# Altium PCB H743ZI_SD_LCD_DRAM_Dev.PcbDoc (part 1 of 2)
Units mm, origin at the board's own origin, x right, y up, seen from the top; angles counter-clockwise.
Board outline 91.52 x 133.34 mm, 2 copper layers (Top Layer, Bottom Layer); 88 components, 125 nets, 598 pads, 322 vias.
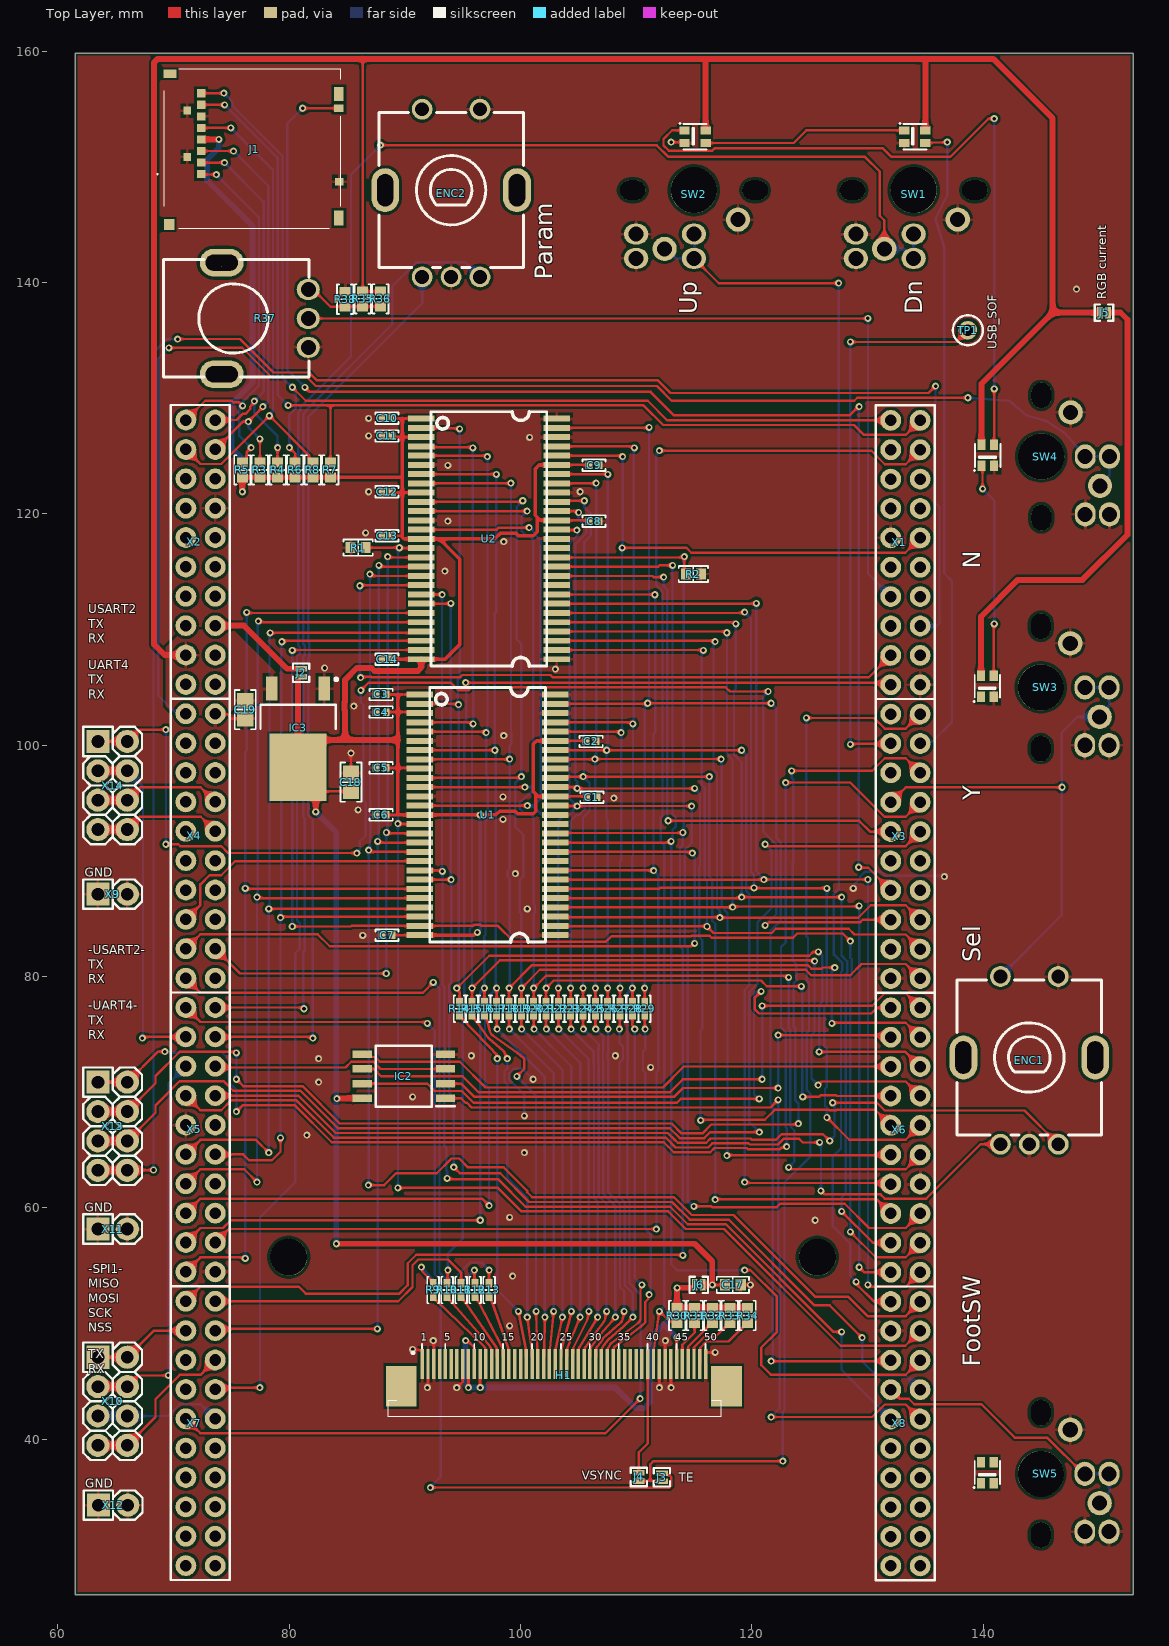
[diagram p0: Top Layer view]
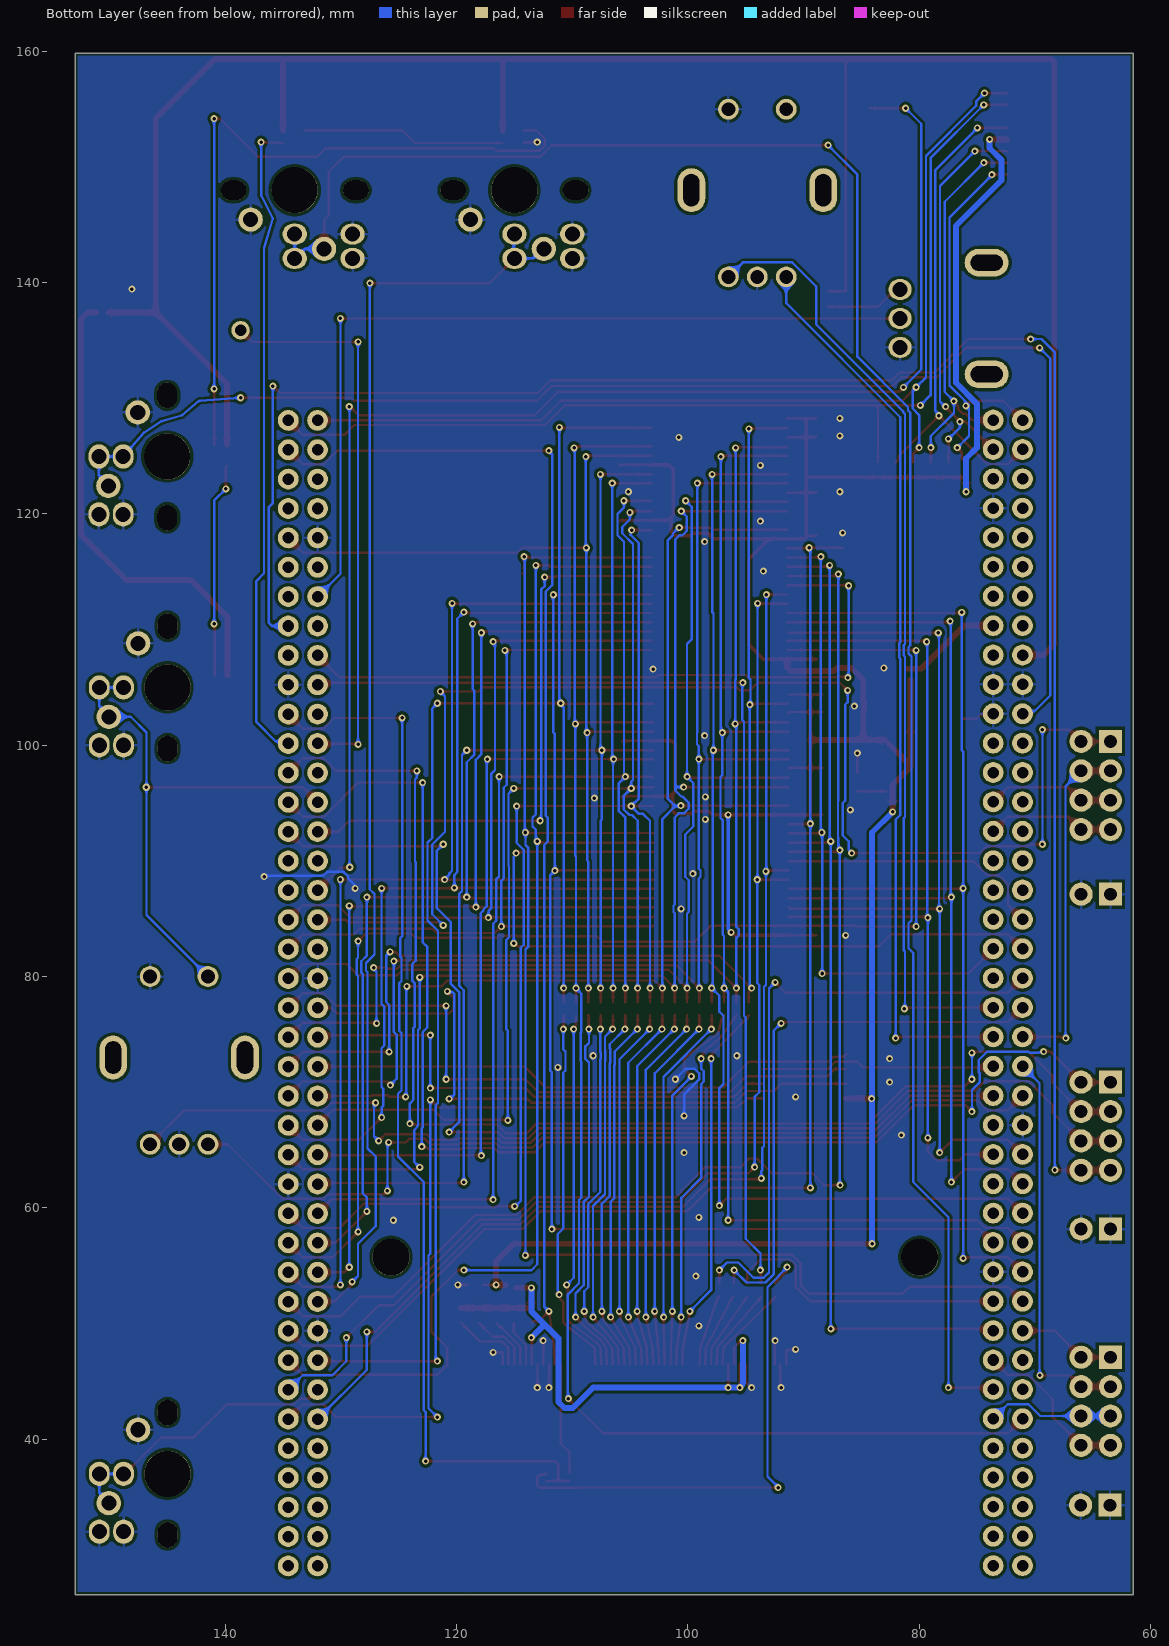
[diagram p1: Bottom Layer view, seen from below]

## Layer stack, top to bottom
Top Solder: solder mask 0.0102, Solder Resist, Dk 3.5
Top Layer: signal copper 0.0356
Dielectric 1: dielectric 0.32, FR-4, Dk 4.8
Bottom Layer: signal copper 0.0356
Bottom Solder: solder mask 0.0102, Solder Resist, Dk 3.5

## Board outline
61.479,26.521 61.479,159.861 153,159.861 153,26.521 135.818,26.521 119.187,26.521 105.187,26.521

## Design rules (kind name [scope] priority, off if disabled: settings)
BoardOutlineClearance [All] p1: gap=0.254 ignorepadtopadclearanceinfootprint=FALSE except(0: Arc-SplitContinuation Track-SplitContinuation SMDPad-SplitContinuation THPad-SplitContinuation Via-SplitContinuation Fill-SplitContinuation Poly-SplitContinuation Region-SplitContinuation Text-SplitContinuation)
Clearance [All] p1: gap=0.254 ignorepadtopadclearanceinfootprint=FALSE except(0.203: Arc-Arc Arc-Track Arc-SMDPad Arc-Fill Arc-Poly Arc-Region Track-Track Track-SMDPad Track-Fill Track-Poly Track-Region SMDPad-SMDPad SMDPad-Fill SMDPad-Poly SMDPad-Region)
PolygonConnect [All] p1: thpad.connectstyle=Relief thpad.reliefconductorwidth=0.254 thpad.reliefentries=4 thpad.polygonreliefangle="90 Angle" thpad.airgapwidth=0.254 smdpad.connectstyle=Relief smdpad.reliefconductorwidth=0.254 smdpad.reliefentries=4 smdpad.polygonreliefangle="90 Angle" smdpad.airgapwidth=0.254 via.connectstyle=Direct via.reliefconductorwidth=0.254 via.reliefentries=4 via.polygonreliefangle="90 Angle" via.airgapwidth=0.254
RoutingVias [All] p1: holewidth=0.305 width=0.61 viastyle="Through Hole" minholewidth=0.305 minwidth=0.61 maxholewidth=0.305 maxwidth=0.61
SolderMaskExpansion [All] p1: expansion=0.102 istentingtop=FALSE
Width [All] p1: maxlimit=0.635 minlimit=0.203 preferedwidth=0.203
30 further rules are at their usual default settings.

## Classes and differential pairs
net class D[0..15]: D0 D1 D2 D3 D4 D5 D6 D7 D8 D9 D10 D11 D12 D13 D14 D15
net class A[0..11]: A0 A1 A2 A3 A4 A5 A6 A7 A8 A9 A10 A11

## Components (designator, comment, footprint, x,y, rotation, side; value= is the part's Value field where it differs from the comment)
C1 "0.1µF" "CAP 0402_1005" 106.172,95.504 r0 top
C2 "0.1µF" "CAP 0402_1005" 106.104,100.33 r0 top
C3 "0.1µF" "CAP 0402_1005" 87.952,104.394 r180 top
C4 "0.1µF" "CAP 0402_1005" 87.952,102.87 r180 top
C5 "0.1µF" "CAP 0402_1005" 87.952,98.044 r180 top
C6 "0.1µF" "CAP 0402_1005" 87.952,93.98 r180 top
C7 "0.1µF" "CAP 0402_1005" 88.46,83.566 r180 top
C8 "0.1µF" "CAP 0402_1005" 106.358,119.38 r0 top
C9 "0.1µF" "CAP 0402_1005" 106.358,124.206 r0 top
C10 "0.1µF" "CAP 0402_1005" 88.46,128.27 r180 top
C11 "0.1µF" "CAP 0402_1005" 88.46,126.746 r180 top
C12 "0.1µF" "CAP 0402_1005" 88.46,121.92 r180 top
C13 "0.1µF" "CAP 0402_1005" 88.46,118.11 r180 top
C14 "0.1µF" "CAP 0402_1005" 88.46,107.442 r180 top
C17 "0.1 µF" "CAP 0603_1608" 118.364,53.34 r180 top
C18 "10 µF" "CAP 0805_2012" 85.344,96.812 r270 top
C19 "1 µF" "CAP 0805_2012" 76.2,103.086 r90 top
ENC1 "Encoder_15mm" EC11_15mm 144,73 r0 top
ENC2 "Encoder_15mm" EC11_15mm 94,148 r0 top
H1 "FFC_50_DBG" FFC_50_DBG 100.004,44.232 r0 top
IC2 "N25Q128A13ESE40F" SOIC127P790X216-8N 89.916,71.374 r180 top
IC3 "LD1117DT33TR" TO228P972X240-3N 80.766,100.552 r270 top
J1 "SCHA4B0400" SCHA4B0400 71.19,151.609 r270 top
J2 "" "CON: JUMPER x1" 81.026,106.618 r270 top
J3 "" "CON: JUMPER x1" 112.237,37.053 r270 top
J4 "" "CON: JUMPER x1" 110.236,37.084 r270 top
J5 "" "CON: JUMPER x1" 150.114,137.414 r0 top
J6 "" "CON: JUMPER x1" 115.762,53.34 r180 top
R1 "10 kOhms" "RES 0603_1608" 85.964,117.094 r0 top
R2 "10 kOhms" "RES 0603_1608" 114.95,114.808 r180 top
R3 "10 kOhms" "RES 0603_1608" 77.47,123.81 r270 top
R4 "10 kOhms" "RES 0603_1608" 78.994,123.81 r270 top
R5 "10 kOhms" "RES 0603_1608" 75.946,123.81 r270 top
R6 "10 kOhms" "RES 0603_1608" 80.518,123.81 r270 top
R7 "10 kOhms" "RES 0603_1608" 83.566,123.81 r270 top
R8 "10 kOhms" "RES 0603_1608" 82.042,123.81 r270 top
R9 "22 Ohms" "RES 0402_1005" 92.456,52.899 r90 top
R10 "22 Ohms" "RES 0402_1005" 93.662,52.899 r90 top
R11 "22 Ohms" "RES 0402_1005" 94.869,52.899 r90 top
R12 "22 Ohms" "RES 0402_1005" 96.075,52.899 r90 top
R13 "22 Ohms" "RES 0402_1005" 97.282,52.899 r90 top
R14 "22 Ohms" "RES 0402_1005" 94.742,77.216 r90 top
R15 "22 Ohms" "RES 0402_1005" 95.809,77.216 r90 top
R16 "22 Ohms" "RES 0402_1005" 96.876,77.216 r90 top
R17 "22 Ohms" "RES 0402_1005" 97.942,77.216 r90 top
R18 "22 Ohms" "RES 0402_1005" 99.009,77.216 r90 top
R19 "22 Ohms" "RES 0402_1005" 100.076,77.216 r90 top
R20 "22 Ohms" "RES 0402_1005" 101.143,77.216 r90 top
R21 "22 Ohms" "RES 0402_1005" 102.21,77.216 r90 top
R22 "22 Ohms" "RES 0402_1005" 103.276,77.216 r90 top
R23 "22 Ohms" "RES 0402_1005" 104.343,77.216 r90 top
R24 "22 Ohms" "RES 0402_1005" 105.41,77.216 r90 top
R25 "22 Ohms" "RES 0402_1005" 106.477,77.216 r90 top
R26 "22 Ohms" "RES 0402_1005" 107.544,77.216 r90 top
R27 "22 Ohms" "RES 0402_1005" 108.61,77.216 r90 top
R28 "22 Ohms" "RES 0402_1005" 109.677,77.216 r90 top
R29 "22 Ohms" "RES 0402_1005" 110.744,77.216 r90 top
R30 "10 kOhms" "RES 0603_1608" 113.538,50.688 r90 top
R31 "10 Ohms" "RES 0603_1608" 115.062,50.688 r90 top
R32 "10 Ohms" "RES 0603_1608" 116.586,50.688 r90 top
R33 "10 Ohms" "RES 0603_1608" 118.11,50.688 r90 top
R34 "10 Ohms" "RES 0603_1608" 119.634,50.688 r90 top
R35 "10 kOhms" "RES 0603_1608" 86.36,138.602 r90 top
R36 "10 kOhms" "RES 0603_1608" 87.884,138.602 r90 top
R37 "100k" POT 75.946,136.906 r90 top
R38 "10 kOhms" "RES 0603_1608" 84.836,138.572 r270 top
SW1 "Kailh" KAILH_UNI_MX_WS2812 134,148 r180 top
SW2 "Kailh" KAILH_UNI_MX_WS2812 115,148 r180 top
SW3 "Kailh" KAILH_UNI_MX_WS2812 145,105 r270 top
SW4 "Kailh" KAILH_UNI_MX_WS2812 145.034,124.968 r270 top
SW5 "Kailh" KAILH_UNI_MX_WS2812 145,37 r270 top
TP1 "Test point, Keystone, 5001" "CON: 5116 (Keystone)" 138.684,135.89 r180 top
U1 "W9812G6KH-6" TSOP-54 97.155,93.98 r270 top
U2 "W9812G6KH-6" TSOP-54 97.274,117.842 r270 top
X1 "Connector, 20pin, 2.54mm, 500VAC, 3A" "CON: PBD-20" 132.024,128.095 r270 top
X2 "Connector, 20pin, 2.54mm, 500VAC, 3A" "CON: PBD-20" 71.064,128.12 r270 top
X3 "Connector, 20pin, 2.54mm, 500VAC, 3A" "CON: PBD-20" 132.024,102.695 r270 top
X4 "Connector, 20pin, 2.54mm, 500VAC, 3A" "CON: PBD-20" 71.064,102.72 r270 top
X5 "Connector, 20pin, 2.54mm, 500VAC, 3A" "CON: PBD-20" 71.064,77.32 r270 top
X6 "Connector, 20pin, 2.54mm, 500VAC, 3A" "CON: PBD-20" 132.024,77.295 r270 top
X7 "Connector, 20pin, 2.54mm, 500VAC, 3A" "CON: PBD-20" 71.064,51.92 r270 top
X8 "Connector, 20pin, 2.54mm, 500VAC, 3A" "CON: PBD-20" 132.024,51.895 r270 top
X9 "Connector, 2pin, 2.54mm, 500VAC, 3A" "CON: PLS-2" 64.73,87.122 r0 top
X10 "Connector, 8pin, 2.54mm, 500VAC, 3A" "CON: PLD-8" 64.73,43.27 r270 top
X11 "Connector, 2pin, 2.54mm, 500VAC, 3A" "CON: PLS-2" 64.73,58.166 r0 top
X12 "Connector, 2pin, 2.54mm, 500VAC, 3A" "CON: PLS-2" 64.77,34.29 r0 top
X13 "Connector, 8pin, 2.54mm, 500VAC, 3A" "CON: PLD-8" 64.73,67.056 r270 top
X14 "Connector, 8pin, 2.54mm, 500VAC, 3A" "CON: PLD-8" 64.73,96.52 r270 top

## Footprints (in the part's own frame and the unit in brackets; to place one, negate y for a bottom-side part, rotate by r counter-clockwise, add the part's x,y. Pads: shape width x height; smd on the part's side, far side on the other; paste and mask are expansions set on the pad)
"CAP 0402_1005" [mm] "Chip Capacitor, 2-Leads, Body 1.02x0.51mm, IPC Medium Density"
  rect 0.6x0.64 smd: 1(-0.44,0) 2(0.44,0)
  silkscreen extent -1,-0.5 1,0.5, body extent -0.5,-0.26 0.5,0.26, height 0.52
"CAP 0603_1608" [mm] "Chip Capacitor, 2-Leads, Body 1.60x0.80mm, IPC Medium Density"
  rect 0.9x1 smd: 1(-0.675,0) 2(0.675,0)
  silkscreen extent -1.4,-0.7 1.4,0.7, body extent -0.8,-0.41 0.8,0.41, height 0.82
"CAP 0805_2012" [mm] "Chip Capacitor, 2-Leads, Body 2.00x1.20mm, IPC Medium Density"
  rect 1.3x1.4 smd: 1(-0.8,0) 2(0.8,0)
  silkscreen extent -1.7,-0.9 1.7,0.9, body extent -1,-0.64 1,0.64, height 1.26
"CON: 5116 (Keystone)" [mm]
  round 1.6 hole 1: 1(0,0)
  silkscreen extent -1.3,-1.3 1.3,1.3, body extent -1.27,-1.27 1.27,1.27, height 4.94
"CON: JUMPER x1" [mm]
  rect 0.5x1 smd: 1(0,0) 2(0.7,0)
  silkscreen extent -0.45,-0.7 1.15,0.7
"CON: PBD-20" [mm]
  round 1.8 hole 1: 1(0,0) 2(0,2.54) 3(2.54,0) 4(2.54,2.54) 5(5.08,0) 6(5.08,2.54) 7(7.62,0) 8(7.62,2.54) 9(10.16,0) 10(10.16,2.54) 11(12.7,0) 12(12.7,2.54) 13(15.24,0) 14(15.24,2.54) 15(17.78,0) 16(17.78,2.54) 17(20.32,0) 18(20.32,2.54) 19(22.86,0) 20(22.86,2.54)
  round 0.5 on Top Overlay: ""(-1.775,-1.05)
  round 0.5 on Mech1: ""(-0.6,-0.7)
  silkscreen extent -1.3,-1.3 24.1,3.8, body extent -1.3,-1.3 24.1,3.78, height 8.4
"CON: PLD-8" [mm] "PLD-40 8 pin header"
  rect 2x2 hole 1.1: 1(-3.81,-1.27)
  round 2 hole 1.1: 2(-3.81,1.27) 3(-1.27,-1.27) 4(-1.27,1.27) 5(1.27,-1.27) 6(1.27,1.27) 7(3.81,-1.27) 8(3.81,1.27)
  silkscreen extent -5.08,-2.54 5.08,2.54, body extent -5.13,-2.55 5.03,2.53, height 8.54
"CON: PLS-2" [mm]
  rect 2x2 hole 1.1: 1(-1.27,0)
  round 2 hole 1.1: 2(1.27,0)
  silkscreen extent -2.54,-1.27 2.54,1.27, body extent -2.57,-1.28 2.51,1.26, height 8.54
EC11_15mm [mm]
  round 1.8 hole 1.2: 1(-2.5,7) 2(2.5,7) A(-2.5,-7.5) B(2.5,-7.5) C(0,-7.5)
  oval 2.4x3.8 hole 1.4 slot 2.8 at 90 deg: MT1(-5.7,0) MT2(5.7,0)
  silkscreen extent -6.25,-6.7 6.25,6.7, body extent -6,-7.67 6,7.25, height 21.9
FFC_50_DBG [mm]
  rect 0.3x2.6 smd: 1(-8.5,2.25) 2(-8,2.25) 3(-7.5,2.25) 4(-7,2.25) 5(-6.5,2.25) 6(-6,2.25) 7(-5.5,2.25) 8(-5,2.25) 9(-4.5,2.25) 10(-4,2.25) 11(-3.5,2.25) 12(-3,2.25) 13(-2.5,2.25) 14(-2,2.25) 15(-1.5,2.25) 16(-1,2.25) 17(-0.5,2.25) 18(0,2.25) 19(0.5,2.25) 20(1,2.25) 21(1.5,2.25) 22(2,2.25) 23(2.5,2.25) 24(3,2.25) 25(3.5,2.25) 26(4,2.25) 27(4.5,2.25) 28(5,2.25) 29(5.5,2.25) 30(6,2.25) 31(6.5,2.25) 32(7,2.25) 33(7.5,2.25) 34(8,2.25) 35(8.5,2.25) 36(9,2.25) 37(9.5,2.25) 38(10,2.25) 39(10.5,2.25) 40(11,2.25) 41(11.5,2.25) 42(12,2.25) 43(12.5,2.25) 44(13,2.25) 45(13.5,2.25) 46(14,2.25) 47(14.5,2.25) 48(15,2.25) 49(15.5,2.25) 50(16,2.25)
  rect 2.65x3.5 smd: MP1(-10.312,0.356) MP1(17.812,0.356)
  silkscreen extent -11.5,-2.29 17.35,4.01, body extent -11.49,-2.32 19.01,3.32, height 2.06
KAILH_UNI_MX_WS2812 [mm] "Universal footprint for low-profile and regular switches, direct solder. Kailh RGB Black also supported without led, LED is ws2812 in 2020 package"
  rect 0.9x0.7 smd: 1(0.815,-5.174) 2(0.815,-4.074) 3(-1.015,-4.074) 4(-1.015,-5.174)
  round 2.1 hole 1.3: S1(-3.81,2.54) S2(2.54,5.08)
  oval 2.1x1.8 hole 1.3: S1(5,3.8) S1(5,5.9) S2(0,5.9) S2(0,3.8)
  oval 2.2x1.7 hole 1.7 slot 2.2 at 0 deg unplated paste-2539.97: ""(-5.29,0) ""(5.29,0)
  round 3.98 hole 3.98 unplated paste-2539.97: ""(0,0)
  silkscreen extent -1.1,-5.77 1.2,-3.52, body extent -7.5,-7.5 7.5,7.5, height 8.2
POT [mm]
  oval 1.8x2 hole 1.3: 1(-2.5,-5.704) 2(0,-5.704) 3(2.5,-5.704)
  oval 2.4x3.8 hole 1.4 slot 2.8 at 90 deg: MT1(-4.826,1.778) MT1(4.826,1.778)
  silkscreen extent -5.08,-5.76 5.08,6.81, body extent -5.64,-5.73 5.64,6.92, height 21.1
"RES 0402_1005" [mm] "Chip Resistor, 2-Leads, Body 1.0x0.5mm, IPC Medium Density"
  rect 0.75x0.6 smd: 1(-0.575,0) 2(0.575,0)
  silkscreen extent -1.14,-0.51 1.14,0.51, body extent -0.5,-0.25 0.5,0.25, height 0.35
"RES 0603_1608" [mm] "Chip Resistor, 2-Leads, Body 1.60x0.80mm, IPC Medium Density"
  rect 0.85x0.95 smd: 1(-0.65,0) 2(0.65,0)
  silkscreen extent -1.27,-0.7 1.27,0.7, body extent -0.8,-0.4 0.8,0.4, height 0.45
SCHA4B0400 [mm]
  rect 0.7x0.75 smd: 1(2.225,1.2) 2(1.225,1.2) 3(0.225,1.2) 4(-0.775,1.2) 5(-1.775,1.2) 6(-2.775,1.2) 7(-3.775,1.2) 8(-4.775,1.2)
  rect 0.7x0.65 smd: 9(-3.275,0) 10(0.725,0)
  rect 0.65x0.85 smd: 11(-3.475,13.1)
  rect 0.65x0.75 smd: 12(2.875,13.15)
  rect 1.3x0.85 smd: MP1(6.013,13.1)
  rect 0.95x0.9 smd: MP2(6.575,-1.575)
  rect 0.745x1.15 smd: MP3(-6.46,-1.5)
  rect 1.2x0.85 smd: MP4(-4.713,13.1)
  silkscreen extent -6.91,-2.62 6.91,13.28, body extent -6.91,-2 6.96,13.46, height 1.39
SOIC127P790X216-8N [mm]
  rect 1.65x0.65 smd: 1(-3.6,1.905) 2(-3.6,0.635) 3(-3.6,-0.635) 4(-3.6,-1.905) 5(3.6,-1.905) 6(3.6,-0.635) 7(3.6,0.635) 8(3.6,1.905)
  silkscreen extent -4.43,-2.64 2.42,2.64, body extent -3.95,-2.64 3.95,2.64, height 2.16
TO228P972X240-3N [mm]
  rect 2.1x1 smd: 1(-4.35,2.28) 3(-4.35,-2.28)
  rect 5.85x4.9 smd: 4(2.45,0)
  silkscreen extent -5.27,-3.25 -0.85,3.43, body extent -4.97,-3.3 4.56,3.3, height 2.3
TSOP-54 [mil]
  rect 20x90 smd: 1(-409.45,-230.31) 2(-377.95,-230.31) 3(-346.46,-230.31) 4(-314.96,-230.31) 5(-283.46,-230.31) 6(-251.97,-230.31) 7(-220.47,-230.31) 8(-188.98,-230.31) 9(-157.48,-230.31) 10(-125.98,-230.31) 11(-94.49,-230.31) 12(-62.99,-230.31) 13(-31.5,-230.31) 14(0,-230.31) 15(31.5,-230.31) 16(62.99,-230.31) 17(94.49,-230.31) 18(125.98,-230.31) 19(157.48,-230.31) 20(188.98,-230.31) 21(220.47,-230.31) 22(251.97,-230.31) 23(283.46,-230.31) 24(314.96,-230.31) 25(346.46,-230.31) 26(377.95,-230.31) 27(409.45,-230.31) 28(409.45,230.32) 29(377.95,230.32) 30(346.46,230.32) 31(314.96,230.32) 32(283.46,230.32) 33(251.97,230.32) 34(220.47,230.32) 35(188.98,230.32) 36(157.48,230.32) 37(125.98,230.32) 38(94.49,230.32) 39(62.99,230.32) 40(31.5,230.32) 41(0,230.32) 42(-31.5,230.32) 43(-62.99,230.32) 44(-94.49,230.32) 45(-125.98,230.32) 46(-157.48,230.32) 47(-188.98,230.32) 48(-220.47,230.32) 49(-251.97,230.32) 50(-283.46,230.32) 51(-314.96,230.32) 52(-346.46,230.32) 53(-377.95,230.32) 54(-409.45,230.32)
  silkscreen extent -433,-197 433,197, body extent -443,-230 443,226, height 55

## Part data
C1 C2 C3 C4 C5 C6 C7 C8 C9 C10 C11 C12 C13 C14: library part C0402C104K4RACAUTO, "CAP CER 0.1UF 16V X7R 0402", Device Package="0402 (1005 Metric)", Manufacturer=KEMET, Operating Temperature="-55°C ~ 125°C", Ratings=AEC-Q200, Supplier Part Number 1=399-6828-1-ND, Temperature Coefficient=X7R, Tolerance=±10%, Voltage - Rated=16V, Applications="Automotive, Bypass, Decoupling", Capacitance=0.1µF, ComponentLink1Description=Datasheet, ComponentLink1URL=https://api.kemet.com/component-edge/download/specsheet/C0402C104K4RACAUTO.pdf, ComponentLink2Description="DigiKey Link", ComponentLink2URL=http://digikey.com/product-detail/en/kemet/C0402C104K4RACAUTO/399-6828-1-ND/3314343, LastUpdated="9/2/2020 1:02:21 AM", Lifecycle Status=Active, Minimum Order=1, Mounting Type="Surface Mount, MLCC", Package / Case="0402 (1005 Metric)", Packaging=TapeAndReel, Part Number=C0402C104K4RACAUTO, Part Status=Active, PartId=3024, Price=0.01, Series="SMD Auto X7R", Size / Dimension="0.039\" L x 0.020\" W (1.00mm x 0.50mm)", Supplier 1=DigiKey, Thickness (Max)="0.022\" (0.55mm)"
C17: library part C0603C104K5RAC7411, "CAP CER 0.1UF 50V X7R 0603", Device Package="0603 (1608 Metric)", Manufacturer=KEMET, Operating Temperature="-55°C ~ 125°C", Supplier Part Number 1=399-C0603C104K5RAC7411CT-ND, Temperature Coefficient=X7R, Tolerance=±10%, Voltage - Rated=50V, Applications="Bypass, Decoupling", Capacitance="0.1 µF", ComponentLink1Description=Datasheet, ComponentLink1URL=https://api.kemet.com/component-edge/download/datasheet/C0603C104K5RAC7411.pdf, ComponentLink2Description="DigiKey Link", ComponentLink2URL=https://www.digikey.com/en/products/detail/kemet/C0603C104K5RAC7411/3317013, LastUpdated="2/9/2024 8:10:30 PM", Lifecycle Status=Active, Minimum Order=1, Mounting Type="Surface Mount, MLCC", Package / Case="0603 (1608 Metric)", Packaging=TapeAndReel, Part Number=C0603C104K5RAC7411, Part Status=Active, PartId=2233, Price=0.01, Series="SMD Comm X7R", Size / Dimension="0.063\" L x 0.031\" W (1.60mm x 0.80mm)", Supplier 1=DigiKey, Thickness (Max)="0.035\" (0.90mm)"
C18: library part C0805C106K8PAC7800, "CAP CER 10UF 10V X5R 0805", Device Package="0805 (2012 Metric)", Manufacturer=KEMET, Operating Temperature="-55°C ~ 85°C", Supplier Part Number 1=399-C0805C106K8PAC7800CT-ND, Temperature Coefficient=X5R, Tolerance=±10%, Voltage - Rated=10V, Applications="Bypass, Decoupling", Capacitance="10 µF", ComponentLink1Description=Datasheet, ComponentLink1URL=https://connect.kemet.com:7667/gateway/IntelliData-ComponentDocumentation/1.0/download/datasheet/C0805C106K8PACTU, ComponentLink2Description="DigiKey Link", ComponentLink2URL=https://www.digikey.com/en/products/detail/kemet/C0805C106K8PAC7800/1090830, LastUpdated="9/14/2022 7:51:56 AM", Lifecycle Status=Active, Minimum Order=1, Mounting Type="Surface Mount, MLCC", Package / Case="0805 (2012 Metric)", Packaging=TapeAndReel, Part Number=C0805C106K8PAC7800, Part Status=Active, PartId=44790, Price=0.02, Series="SMD Comm X5R", Size / Dimension="0.079\" L x 0.049\" W (2.00mm x 1.25mm)", Supplier 1=DigiKey, Thickness (Max)="0.055\" (1.40mm)"
C19: library part C0805C105K4RAC7800, "CAP CER 1UF 16V X7R 0805", Device Package="0805 (2012 Metric)", Manufacturer=KEMET, Operating Temperature="-55°C ~ 125°C", Supplier Part Number 1=399-C0805C105K4RAC7800CT-ND, Temperature Coefficient=X7R, Tolerance=±10%, Voltage - Rated=16V, Applications="Bypass, Decoupling", Capacitance="1 µF", ComponentLink1Description=Datasheet, ComponentLink1URL=https://api.kemet.com/component-edge/download/datasheet/C0805C105K4RACTU.pdf, ComponentLink2Description="DigiKey Link", ComponentLink2URL=https://www.digikey.com/en/products/detail/kemet/C0805C105K4RAC7800/416047, LastUpdated="9/19/2022 1:03:30 PM", Lifecycle Status=Active, Minimum Order=1, Mounting Type="Surface Mount, MLCC", Package / Case="0805 (2012 Metric)", Packaging=TapeAndReel, Part Number=C0805C105K4RAC7800, Part Status=Active, PartId=32075, Price=0.01, Series="SMD Comm X7R", Size / Dimension="0.079\" L x 0.049\" W (2.00mm x 1.25mm)", Supplier 1=DigiKey, Thickness (Max)="0.039\" (1.00mm)"
IC2: "Integrated Circuit", Manufacturer_Name=Micron, Mouser Part Number=340-182267, Arrow Part Number=N25Q128A13ESE40F, Arrow Price/Stock=https://www.arrow.com/en/products/n25q128a13ese40f/micron-technology, Datasheet Link=https://datasheet.datasheetarchive.com/originals/distributors/Datasheets-DGA23/1494983.pdf, Height=2.16mm, Manufacturer_Part_Number=N25Q128A13ESE40F, Mouser Price/Stock=https://www.mouser.co.uk/ProductDetail/Micron/N25Q128A13ESE40F?qs=taEdVNyAfdHw8xv9Y4zfpQ%3D%3D
IC3: "Integrated Circuit", Manufacturer_Name=STMicroelectronics, Mouser Part Number=511-LD1117DT33-TR, Arrow Part Number=LD1117DT33TR, Arrow Price/Stock=https://www.arrow.com/en/products/ld1117dt33tr/stmicroelectronics?region=nac, Datasheet Link=http://www.st.com/web/en/resource/technical/document/datasheet/CD00000544.pdf, Height=2.4mm, Manufacturer_Part_Number=LD1117DT33TR, Mouser Price/Stock=https://www.mouser.co.uk/ProductDetail/STMicroelectronics/LD1117DT33TR?qs=4JhUBQGAOSd4P5jVYGxp2g%3D%3D
J1: "SD card Connector", Manufacturer_Name="ALPS Electric", Mouser Part Number=688-SCHA4B0400, Datasheet Link=https://br.mouser.com/datasheet/2/15/SCHA-1155938.pdf, Height=1.29mm, Manufacturer_Part_Number=SCHA4B0400, Mouser Price/Stock=https://www.mouser.com/Search/Refine.aspx?Keyword=688-SCHA4B0400
J2 J3 J4 J5 J6: library part Jumper_single, CommentText="\"Перемычка\""
R1 R2 R3 R4 R5 R6 R7 R8 R30: library part ERJ-3EKF1002V, "RES SMD 10K OHM 1% 1/10W 0603", Device Package="0603 (1608 Metric)", Manufacturer="Panasonic Electronic Components", Operating Temperature="-55°C ~ 155°C", Power (Watts)="0.1W, 1/10W", Ratings=AEC-Q200, Supplier Device Package=0603, Supplier Part Number 1=P10.0KHCT-ND, Temperature Coefficient=±100ppm/°C, Tolerance=±1%, ComponentLink1Description=Datasheet, ComponentLink1URL=https://industrial.panasonic.com/cdbs/www-data/pdf/RDA0000/AOA0000C304.pdf, ComponentLink2Description="DigiKey Link", ComponentLink2URL=https://www.digikey.com/en/products/detail/panasonic-electronic-components/ERJ-3EKF1002V/196066, Composition="Thick Film", Features="Automotive AEC-Q200", Height - Seated (Max)="0.022\" (0.55mm)", LastUpdated="2/9/2024 8:41:59 PM", Lifecycle Status=Active, Minimum Order=1, Number of Terminations=2, Package / Case="0603 (1608 Metric)", Packaging=TapeAndReel, Part Number=ERJ-3EKF1002V, Part Status=Active, PartId=25695, Price=0.01, Resistance="10 kOhms", Series=ERJ-3EK, Size / Dimension="0.063\" L x 0.031\" W (1.60mm x 0.80mm)", Supplier 1=DigiKey
R9 R10 R11 R12 R13 R14 R15 R16 R17 R18 R19 R20 R21 R22 R23 R24 R25 R26 R27 R28 R29: library part RMCF0402JT22R0, "RES 22 OHM 5% 1/16W 0402", Device Package="0402 (1005 Metric)", Manufacturer="Stackpole Electronics Inc", Operating Temperature="-55°C ~ 155°C", Power (Watts)="0.063W, 1/16W", Ratings=AEC-Q200, Supplier Device Package=0402, Supplier Part Number 1=RMCF0402JT22R0CT-ND, Temperature Coefficient=±100ppm/°C, Tolerance=±5%, ComponentLink1Description=Datasheet, ComponentLink1URL=https://www.seielect.com/catalog/sei-rmcf_rmcp.pdf, ComponentLink2Description="DigiKey Link", ComponentLink2URL=https://www.digikey.com/en/products/detail/stackpole-electronics-inc/RMCF0402JT22R0/1758165, Composition="Thick Film", Features="Automotive AEC-Q200", Height - Seated (Max)="0.016\" (0.40mm)", LastUpdated="2/9/2024 8:30:03 PM", Lifecycle Status=Active, Minimum Order=1, Number of Terminations=2, Package / Case="0402 (1005 Metric)", Packaging=CutTape, Part Number=RMCF0402JT22R0, Part Status=Active, PartId=7671, Price=0.01, Resistance="22 Ohms", Series=RMCF, Size / Dimension="0.039\" L x 0.020\" W (1.00mm x 0.50mm)", Supplier 1=DigiKey
R31 R32 R33 R34: library part ERJ-PA3F10R0V, "RES SMD 10 OHM 1% 1/3W 0603", Device Package="0603 (1608 Metric)", Manufacturer="Panasonic Electronic Components", Operating Temperature="-55°C ~ 155°C", Power (Watts)="0.333W, 1/3W", Ratings=AEC-Q200, Supplier Device Package=0603, Supplier Part Number 1=P10.00BYCT-ND, Temperature Coefficient=±100ppm/°C, Tolerance=±1%, ComponentLink1Description=Datasheet, ComponentLink1URL=https://industrial.panasonic.com/cdbs/www-data/pdf/RDO0000/AOA0000C331.pdf, ComponentLink2Description="DigiKey Link", ComponentLink2URL=https://www.digikey.com/en/products/detail/panasonic-electronic-components/ERJ-PA3F10R0V/5035852, Composition="Thick Film", Features="Automotive AEC-Q200, Pulse Withstanding", Height - Seated (Max)="0.022\" (0.55mm)", Lifecycle Status=Active, Minimum Order=1, Number of Terminations=2, Package / Case="0603 (1608 Metric)", Packaging=TapeAndReel, Part Number=ERJ-PA3F10R0V, Part Status=Active, PartId=5368, Price=0.01, Resistance="10 Ohms", Series=ERJ-PA3, Size / Dimension="0.063\" L x 0.031\" W (1.60mm x 0.80mm)", Supplier 1=DigiKey
  R31: LastUpdated="2/9/2024 8:43:35 PM"
  R32 R33 R34: LastUpdated="9/16/2023 7:33:50 PM"
R35 R36 R38: library part ERJ-3EKF1002V, "RES SMD 10K OHM 1% 1/10W 0603", Part Number=ERJ-3EKF1002V
R37: library part "POT 9MM 100K"
SW1 SW2 SW3 SW4 SW5: library part Kailh_hotswap_WS2812, "Kailh keyboard switch, hotswap rgb, dual-side hotswap options + low prifile variant"
TP1: library part Connector_Test_Point, Manufacturer=Keystone, PartNumber=5001, HelpURL=https://www.digikey.com/product-detail/en/keystone-electronics/5001/36-5001-ND/255327, TypeConnector="Test point", ValueManufacturerPartNumber="Test point, Keystone, 5001"
X1 X2 X3 X4 X5 X6 X7 X8: library part PBD-20, CurrentMax=3A, Manufacturer=Connfly, VoltageMax=500VAC, CommentText="\"Разъем\"", HelpURL=https://www.chipdip.ru/product/pbd-20, Multichannel=20pin, PartNumber=PBD-20, Pitch=2.54mm, TypeConnector=Connector, ValueManufacturerPartNumber="Connector, 20pin, 2.54mm, 500VAC, 3A"
X9 X11 X12: library part PLS-2, CurrentMax=3A, Manufacturer=Connfly, VoltageMax=500VAC, CommentText="\"Разъем\"", HelpURL=https://www.chipdip.ru/product/pls-2, Multichannel=2pin, PartNumber=PLS-2, Pitch=2.54mm, TypeConnector=Connector, ValueManufacturerPartNumber="Connector, 2pin, 2.54mm, 500VAC, 3A"
X10 X13 X14: library part PLD-8, CurrentMax=3A, Manufacturer=Connfly, VoltageMax=500VAC, CommentText="\"Разъем\"", HelpURL=https://www.chipdip.ru/product/pld-8-ds1021-2x4, Multichannel=8pin, PartNumber=PLD-8, Pitch=2.54mm, TypeConnector=Connector, ValueManufacturerPartNumber="Connector, 8pin, 2.54mm, 500VAC, 3A"
H1: System=Connector

## Free pads (board coordinates)
  round 3.2 hole 3.2 unplated: 0(79.954,55.73) 0(125.674,55.73)

## Via types
v1: diameter 0.61, hole 0.305, Top Layer to Bottom Layer, tented both sides, 322 vias

## Nets (pads, with @x,y where several pads share a name; then routed paths per layer and width w, separated by ;. In a path a pad name is that pad's centre, name@x,y a point inside that pad or via, vN(x,y) a via of type N, cw(c..) or ccw(c..) an arc to the next point about the centre after c; other vN are vias at no path point)
3V_LCD: H1.9 H1.10 H1.11 H1.45 J6.2 R30.2 R31.2 R32.2 R33.2 R34.2 | length 50.9
  Top Layer w0.203: v1(95.25,48.514) 95.328,48.436 95.492,48.436 96.004,47.924 H1.10@96.004,46.482 ; v1(95.504,44.45) H1.9@95.504,46.482 ; H1.11@96.504,46.482 96.504,44.466 v1(96.52,44.45) ; H1.45@113.504,46.482 113.504,48.734 v1(113.538,48.768)
  Top Layer w0.508: 114.808,53.086 v1(113.538,53.086) R30.2@113.538,51.338 R34.2@119.634,51.338
  Bottom Layer w0.508: v1(95.25,48.514) 95.25,44.837 95.301,44.787 95.301,44.681 ; v1(95.504,44.45) v1(96.52,44.45) 108.204,44.45 109.957,42.697 110.68,42.697 111.201,43.218 111.201,48.717 112.37,49.886 ; v1(113.538,48.768) 112.42,49.886 112.37,49.886 ; v1(113.538,53.086) 113.538,51.054 112.37,49.886
5V_USB_STLK: X1.8
+3V3: J2.1 X2.16 | length 9
  Top Layer w0.508: X2.16@73.604,110.34 76.096,110.34 79.818,106.618 J2.1@81.026,106.618
+5V: C19.2 IC3.3 J5.1 R35.2 R36.2 SW1.4 SW2.4 SW4.4 X2.17 | length 202.3
  Top Layer w0.203: 86.36,159.353 R35.2@86.36,139.252 R36.2@87.884,139.252
  Top Layer w0.508: X2.17@71.064,107.8 69.238,107.8 68.326,108.712 68.326,159.055 68.624,159.353 86.36,159.353 116.078,159.353 ; SW2.4@116.015,153.174 116.015,159.29 116.078,159.353 ; SW1.4@135.015,153.174 135.015,159.212 134.874,159.353 ; SW4.4@139.86,125.983 139.86,131.259 146.015,137.414 ; J5.1@150.114,137.414 146.015,137.414 ; 116.078,159.353 134.874,159.353 ; 134.874,159.353 140.875,159.353 146.015,154.213 146.015,137.414
+MCU: C1.1 C2.1 C3.1 C4.1 C5.1 C6.1 C7.1 C8.1 C9.1 C10.1 C11.1 C12.1 C13.1 C14.1 C17.2 C18.2 IC2.8 IC3.4 J1.4 J2.2 J6.1 R3.2 R4.2 R5.2 R6.2 R7.2 R8.2 U1.1 U1.3 U1.9 U1.14 U1.27 U1.43 U1.49 U2.1 U2.3 U2.9 U2.14 U2.27 U2.43 U2.49 | length 292.2
  Top Layer w0.203: IC3.4@82.856,96.012 C18.2@85.344,96.012 ; C6.1@88.392,93.98 89.408,93.98 ; C5.1@88.392,98.044 89.408,98.044 91.241,98.044 U1.9@91.305,97.98 ; C4.1@88.392,102.87 89.408,102.87 91.215,102.87 U1.3@91.305,102.78 ; C3.1@88.392,104.394 89.408,104.394 91.291,104.394 U1.1@91.305,104.38 ; C7.1@88.9,83.566 88.914,83.58 U1.27@91.305,83.58 ; C13.1@88.9,118.11 89.662,118.11 ; C12.1@88.9,121.92 88.978,121.842 89.781,121.842 U2.9@91.424,121.842 ; C11.1@88.9,126.746 89.004,126.642 89.781,126.642 U2.3@91.424,126.642 ; C10.1@88.9,128.27 89.781,128.27 91.396,128.27 U2.1@91.424,128.242 ; 89.751,123.16 89.781,123.19 ; U1.43@103.005,95.58 105.656,95.58 C1.1@105.732,95.504 ; U1.49@103.005,100.38 105.614,100.38 C2.1@105.664,100.33 ; U2.43@103.124,119.442 105.856,119.442 C8.1@105.918,119.38 ; U2.49@103.124,124.242 105.882,124.242 C9.1@105.918,124.206 ; v1(116.586,53.34) C17.2@117.689,53.34
  Top Layer w0.305: R5.2@75.946,123.16 R3.2@77.47,123.16 R7.2@83.566,123.16 89.751,123.16 ; C14.1@88.9,107.442 U2.27@91.424,107.442 93.472,107.442 94.742,108.712 94.742,116.078 92.978,117.842 ; 89.408,104.394 89.408,102.87 89.408,100.457 89.408,98.044 89.408,93.98 U1.14@91.305,93.98 v1(96.52,93.98) 97.873,93.98 98.193,94.301 99.526,94.301 99.758,94.069 101.09,94.069 101.312,94.291 101.312,95.763 ; 89.781,128.27 89.781,126.642 89.781,123.19 89.781,121.842 89.781,117.991 89.93,117.842 U2.14@91.424,117.842 92.978,117.842 ; U1.27@91.305,83.58 95.944,83.58 96.184,83.82 v1(96.266,83.82) ; 101.548,95.57 101.088,96.03 101.088,100.072 101.396,100.38 U1.49@103.005,100.38 ; 101.579,95.57 U1.43@102.995,95.57 ; U2.43@103.124,119.442 103.1,119.466 101.714,119.466 101.461,119.72 ; U2.49@103.124,124.242 101.636,124.242 101.288,123.894 101.288,119.892 101.461,119.72 ; 92.978,117.842 97.786,117.842 98.257,118.313 99.631,118.313 99.835,118.11 101.109,118.11 101.461,118.461 101.461,119.72
  Top Layer w0.508: J1.4@72.39,152.384 73.898,152.384 v1(73.914,152.4) ; v1(75.946,121.92) R5.2@75.946,123.16 ; 80.772,105.664 80.766,105.658 IC3.4@80.766,98.261 ; v1@82.301,94.239 82.301,96.567 IC3.4@80.766,98.102 IC3.4@80.766,98.261 ; v1(84.074,56.896) 115.062,56.896 116.586,55.372 v1(116.586,53.34) J6.1@115.762,53.34 ; v1(84.117,69.45) 84.135,69.469 IC2.8@86.316,69.469 ; 89.408,100.457 84.836,100.457 ; U2.27@91.424,107.442 91.424,106.724 91.126,106.426 87.376,106.426 87.122,106.68 85.852,106.68 84.836,105.664 84.836,103.765 84.785,103.715 84.785,103.041 84.836,102.991 84.836,100.457 ; IC3.4@80.766,98.261 82.962,100.457 84.836,100.457
  Bottom Layer w0.305: v1(96.266,83.82) 96.52,84.074 v1(96.52,93.98)
  Bottom Layer w0.508: v1(73.914,152.4) 73.914,151.638 72.898,150.622 72.898,148.844 76.825,144.917 76.825,131.35 75.013,129.538 75.013,125.729 75.946,124.796 v1(75.946,121.92) ; v1(82.296,94.234) 84.074,92.456 v1(84.074,56.896)
A0: U1.23 U2.23 X5.13 | length 83.7
  Top Layer w0.203: X5.13@71.064,62.08 72.32,63.335 76.111,63.335 v1(77.216,62.23) ; v1(77.335,110.73) 77.445,110.73 77.533,110.642 U2.23@91.424,110.642 ; v1@77.414,86.78 U1.23@91.305,86.78
  Bottom Layer w0.203: v1(77.216,62.23) v1(77.216,86.868) 77.275,86.927 77.275,110.67 v1(77.335,110.73)
A1: U1.24 U2.24 X5.11 | length 79.2
  Top Layer w0.203: X5.11@71.064,64.62 72.32,65.875 77.127,65.875 v1(78.232,64.77) ; v1(78.232,85.852) 91.177,85.852 U1.24@91.305,85.98 ; v1(78.351,109.714) U2.24@91.296,109.714
  Bottom Layer w0.203: v1(78.232,64.77) v1(78.232,85.852) 78.291,85.911 78.291,109.654 v1(78.351,109.714)
A2: U1.25 U2.25 X5.12 | length 74.3
  Top Layer w0.203: X5.12@73.604,64.62 76.016,64.62 76.526,64.11 78.506,64.11 79.248,64.852 v1(79.248,66.04) ; v1(79.367,108.952) 79.477,108.952 79.567,109.042 U2.25@91.424,109.042 ; v1@79.448,85.18 U1.25@91.305,85.18
  Bottom Layer w0.203: v1(79.248,66.04) v1(79.248,85.09) 79.307,85.149 79.307,108.892 v1(79.367,108.952)
A3: U1.26 U2.26 X6.18 | length 117.4
  Top Layer w0.203: v1(80.264,84.328) 85.332,84.328 85.384,84.38 U1.26@91.305,84.38 95.892,84.38 95.992,84.48 96.54,84.48 96.64,84.38 98.053,84.38 99.412,83.021 107.4,83.021 107.867,83.488 114.747,83.488 114.788,83.529 116.353,83.529 116.519,83.363 123.577,83.363 123.932,83.718 127.864,83.718 v1(128.524,83.058) ; v1(80.264,108.204) 80.302,108.242 U2.26@91.424,108.242 ; v1(128.524,57.912) 130.717,55.719 133.308,55.719 X6.18@134.564,56.975
  Bottom Layer w0.203: v1(80.264,84.328) v1(80.264,108.204) ; v1(128.524,57.912) 128.524,80.042 128.651,80.168 128.651,81.495 128.524,81.621 v1(128.524,83.058)
A4: U1.29 U2.29 X3.18 | length 69.5
  Top Layer w0.203: U1.29@103.005,84.38 103.031,84.354 116.103,84.354 v1(116.129,84.328) ; U2.29@103.124,108.242 115.786,108.242 v1(115.824,108.204) ; v1@116.181,84.328 116.181,84.276 116.688,83.769 121.722,83.769 122.078,84.125 128.391,84.125 128.885,83.63 133.308,83.63 X3.18@134.564,82.375
  Bottom Layer w0.203: v1(115.824,108.204) 115.824,108.094 115.672,107.942 115.672,96.59 115.926,96.336 115.926,88.478 116.129,88.274 v1(116.129,84.328)
A5: U1.30 U2.30 X3.16 | length 70.4
  Top Layer w0.203: U1.30@103.005,85.18 103.05,85.135 117.201,85.135 v1(117.246,85.09) ; U2.30@103.124,109.042 116.764,109.042 v1(116.84,108.966) ; v1@117.336,85.09 129.204,85.09 130.284,86.17 133.308,86.17 X3.16@134.564,84.915
  Bottom Layer w0.203: v1(116.84,108.966) 116.84,108.856 116.688,108.704 116.688,97.86 116.992,97.556 116.992,85.923 117.246,85.669 v1(117.246,85.09)
A6: U1.31 U2.31 X6.19 | length 99.2
  Top Layer w0.203: U1.31@103.005,85.98 103.013,85.988 118.313,85.988 118.376,86.051 129.231,86.051 v1(129.286,86.106) ; U2.31@103.124,109.842 117.632,109.842 117.746,109.728 v1(117.856,109.728) ; v1(129.286,54.864) 129.715,54.435 X6.19@132.024,54.435
  Bottom Layer w0.203: v1(117.856,109.728) 117.856,99.232 118.337,98.751 v1(118.337,85.996) ; v1(129.286,54.864) v1(129.286,86.106)
A7: U1.32 U2.32 X6.17 | length 97.3
  Top Layer w0.203: U1.32@103.005,86.78 118.928,86.78 119.016,86.868 v1(127.762,86.868) ; U2.32@103.124,110.642 118.356,110.642 118.508,110.49 v1(118.618,110.49) ; v1(127.762,59.69) 130.477,56.975 X6.17@132.024,56.975
  Bottom Layer w0.203: v1(118.618,110.49) 118.618,104.865 118.466,104.712 118.466,99.197 119.126,98.537 v1(119.126,86.868) ; v1(127.762,59.69) 127.762,60.893 128.118,61.249 128.118,80.21 128.244,80.337 128.244,81.327 127.762,81.809 v1(127.762,86.868)
A8: U1.33 U2.33 X6.10 | length 93.5
  Top Layer w0.203: U1.33@103.005,87.58 111.981,87.58 112.07,87.669 v1(120.193,87.669) ; U2.33@103.124,111.442 119.316,111.442 v1(119.38,111.506) ; v1@120.162,87.65 126.472,87.65 v1(126.492,87.63) ; v1(126.489,67.811) 126.499,67.811 128.431,65.879 133.308,65.879 X6.10@134.564,67.135
  Bottom Layer w0.203: v1(119.38,111.506) 119.939,110.947 119.939,89.036 120.193,88.782 v1(120.193,87.669) ; v1(126.489,67.811) 126.489,68.665 126.34,68.814 126.34,70.288 126.492,70.44 126.492,73.805 126.263,74.034 126.263,77.399 126.493,77.629 126.493,87.629 v1(126.492,87.63)
A9: U1.34 U2.34 X6.20 | length 108.6
  Top Layer w0.203: U1.34@103.005,88.38 103.006,88.381 v1(121.046,88.382) v1(121.046,88.382) ; U2.34@103.124,112.242 120.37,112.242 v1(120.396,112.268) ; v1@121.046,88.386 121.052,88.392 v1(130.048,88.392) ; v1(130.048,53.34) 130.158,53.34 130.319,53.179 133.308,53.179 X6.20@134.564,54.435
  Bottom Layer w0.203: v1(120.396,112.268) 120.396,89.154 120.626,88.924 120.626,88.803 v1(121.046,88.382) ; v1(130.048,53.34) v1(130.048,88.392)
A10: U1.22 U2.22 X5.19 | length 91.9
  Top Layer w0.203: X5.19@71.064,54.46 72.32,55.715 76.001,55.715 76.09,55.626 v1(76.2,55.626) ; v1(76.2,87.63) 76.25,87.58 U1.22@91.305,87.58 ; v1(76.319,111.492) 76.369,111.442 U2.22@91.424,111.442
  Bottom Layer w0.203: v1(76.2,55.626) 76.2,99.463 76.319,99.582 v1(76.319,111.492)
A11: U1.35 U2.35 X5.18 | length 110.8
  Top Layer w0.203: X5.18@73.604,57 74.77,58.166 v1(111.76,58.166) ; U1.35@103.005,89.18 111.48,89.18 v1(111.506,89.154) ; U2.35@103.124,113.042 v1@111.599,113.042
  Bottom Layer w0.203: v1(111.625,113.016) 111.658,112.983 111.658,101.122 111.506,100.97 111.506,89.044 111.616,89.044 111.912,88.748 111.912,71.862 111.76,71.71 111.76,58.285 v1@111.682,58.207
A21: X5.10
A22: R11.2 X7.2 | length 25.3
  Top Layer w0.203: X7.2@73.604,51.92 89.436,51.92 90.663,53.147 90.663,55.041 91.155,55.533 93.737,55.533 94.869,54.401 R11.2@94.869,53.474
ADC1_INP3: R37.2 X1.13 | length 73.3
  Top Layer w0.203: R37.2@81.65,136.906 v1(130.048,136.906)
  Bottom Layer w0.203: v1(130.048,136.906) 130.048,114.831 X1.13@132.024,112.855
BA0: U1.20 U2.20 X8.9 | length 103.4
  Top Layer w0.203: U1.20@91.305,89.18 93.063,89.18 93.143,89.1 v1(93.253,89.1) ; U2.20@91.424,113.042 93.206,113.042 v1(93.218,113.03) ; v1(93.654,62.541) 93.71,62.484 98.044,62.484 100.432,60.096 112.944,60.096 114.468,58.572 117.77,58.572 127.067,49.276 v1(127.762,49.276)
  Bottom Layer w0.203: v1(93.218,113.03) 93.218,89.135 v1(93.253,89.1) 93.253,79.28 93.421,79.112 93.421,65.329 93.569,65.181 93.569,63.248 93.654,63.163 v1(93.654,62.541) ; v1(127.762,49.276) 127.762,45.997 X8.9@132.024,41.735
BA1: U1.21 U2.21 X8.8 | length 103.8
  Top Layer w0.203: U1.21@91.305,88.38 93.994,88.38 v1(94.004,88.39) ; U2.21@91.424,112.242 93.954,112.242 v1(93.98,112.268) ; v1(94.229,63.527) 94.229,63.521 94.759,62.992 98.254,62.992 100.744,60.503 113.113,60.503 114.637,58.979 118.016,58.979 125.432,51.562 126.746,51.562 v1(129.54,48.768)
  Bottom Layer w0.203: v1(93.98,112.268) 93.98,88.415 v1(94.004,88.39) 94.004,79.444 93.828,79.268 93.828,70.002 94.234,69.596 94.234,63.531 v1(94.229,63.527) ; v1(129.54,48.768) 129.54,46.736 130.746,45.53 133.308,45.53 X8.8@134.564,44.275
D0: R14.2 U1.2 U2.2 X6.6 | length 107.3
  Top Layer w0.203: U1.2@91.305,103.58 94.565,103.58 v1(94.64,103.505) ; U2.2@91.424,127.442 91.461,127.404 94.696,127.404 v1(94.734,127.367) ; R14.2@94.742,77.791 94.742,78.63 94.488,78.884 v1(94.488,78.994) 97.295,81.801 124.964,81.801 125.289,82.126 v1(125.76,82.126) ; v1(125.832,73.488) 133.291,73.488 X6.6@134.564,72.215
  Bottom Layer w0.203: v1(94.488,78.994) 94.488,79.104 94.665,79.281 94.665,103.455 v1@94.628,103.492 ; v1(94.64,103.505) 94.59,103.556 94.59,105.684 94.734,105.828 v1(94.734,127.367) ; v1(125.76,82.126) 126.087,81.799 126.087,77.798 125.833,77.544 125.833,73.489 v1(125.832,73.488)
D1: R15.2 U1.4 U2.4 X6.8 | length 108.5
  Top Layer w0.203: U1.4@91.305,101.98 95.674,101.98 95.8,101.854 v1(95.91,101.854) ; U2.4@91.424,125.842 91.487,125.779 95.814,125.779 v1(95.877,125.716) ; R15.2@95.809,77.791 v1(95.809,78.994) 98.209,81.394 125.362,81.394 v1(125.427,81.329) ; v1(125.73,70.612) 126.048,70.93 133.308,70.93 X6.8@134.564,69.675
  Bottom Layer w0.203: v1(95.809,78.994) 95.809,83.343 95.606,83.546 95.606,84.094 95.809,84.297 95.809,101.803 95.86,101.854 v1(95.91,101.854) ; v1(95.877,125.716) 95.877,105.717 95.91,105.684 v1@95.91,101.905 ; v1(125.427,81.329) 125.427,75.209 125.171,74.953 125.171,71.171 v1(125.73,70.612)
D2: R16.2 U1.5 U2.5 X5.17 | length 105.4
  Top Layer w0.203: X5.17@71.064,57 72.32,58.255 74.285,58.255 74.957,58.928 v1(96.52,58.928) ; U1.5@91.305,101.18 96.94,101.18 v1(97.028,101.092) ; U2.5@91.424,125.042 97.059,125.042 v1(97.147,124.954) ; R16.2@96.876,77.791 v1(96.876,78.994)
  Bottom Layer w0.203: v1(96.52,58.928) 96.52,78.638 v1(96.876,78.994) 96.876,83.496 96.977,83.597 96.977,93.503 97.18,93.706 97.18,97.268 97.028,97.42 97.028,101.202 97.147,101.321 v1(97.147,124.954)
D3: R17.2 U1.7 U2.7 X5.15 | length 105.1
  Top Layer w0.203: X5.15@71.064,59.54 72.32,60.795 96.685,60.795 v1(97.282,60.198) ; U1.7@91.305,99.58 97.778,99.58 v1(97.79,99.568) ; U2.7@91.424,123.442 97.897,123.442 v1(97.909,123.43) ; R17.2@97.942,77.791 v1(97.942,78.994)
  Bottom Layer w0.203: v1(97.282,60.198) 97.282,70.358 96.926,70.714 96.926,76.606 97.282,76.962 97.282,78.334 v1(97.942,78.994) 97.866,79.07 97.866,99.492 v1(97.79,99.568) 97.79,111.401 97.909,111.52 v1(97.909,123.43)
D4: R18.2 U1.8 U2.8 X6.4 | length 102.9
  Top Layer w0.203: U1.8@91.305,98.78 99.034,98.78 v1(99.06,98.806) ; U2.8@91.424,122.642 99.153,122.642 v1(99.179,122.668) ; R18.2@99.009,77.791 v1(99.009,78.994) 101.003,80.988 124.834,80.988 125.153,80.669 126.055,80.669 126.165,80.779 v1(127.177,80.779) ; v1(126.923,75.946) 126.988,76.01 133.308,76.01 X6.4@134.564,74.755
  Bottom Layer w0.203: v1(99.009,78.994) 99.06,79.045 99.06,88.474 98.908,88.626 98.908,89.174 99.06,89.326 v1(99.06,98.806) 99.06,99.938 99.212,100.09 99.212,101.112 99.179,101.145 v1(99.179,122.668) ; v1(126.923,75.946) 126.923,80.415 127.177,80.669 v1(127.177,80.779)
D5: R19.2 U1.10 U2.10 X3.20 | length 98.1
  Top Layer w0.203: U1.10@91.305,97.18 v1@99.864,97.18 ; U2.10@91.424,121.042 99.983,121.042 100.085,121.144 v1(100.195,121.144) ; R19.2@100.076,77.791 v1(100.076,78.994) 101.663,80.581 124.666,80.581 125.129,80.118 128.517,80.118 129.489,81.09 133.308,81.09 X3.20@134.564,79.835
  Bottom Layer w0.203: v1(100.076,78.994) 100.076,85.426 99.924,85.578 99.924,88.322 100.228,88.626 100.228,92.281 99.534,92.975 99.534,96.74 v1(100.076,97.282) 100.076,108.76 99.683,109.153 99.683,120.632 v1(100.195,121.144)
D6: R20.2 U1.11 U2.11 X6.12 | length 114.9
  Top Layer w0.203: U1.11@91.305,96.38 v1(100.377,96.38) ; U2.11@91.424,120.242 v1(100.577,120.242) ; R20.2@101.143,77.791 v1(101.143,78.994) 102.21,80.061 122.94,80.061 123.08,79.921 v1(123.19,79.921) ; v1(123.19,63.5) 123.3,63.5 123.461,63.339 133.308,63.339 X6.12@134.564,64.595
  Bottom Layer w0.203: v1(100.377,96.38) 101.092,96.38 ; v1(100.577,120.242) 100.089,119.754 100.089,118.548 100.476,118.161 100.72,118.161 101.092,117.789 101.092,96.38 ; v1(101.143,78.994) 101.143,85.477 101.244,85.578 101.244,86.126 101.143,86.227 101.143,93.757 100.78,94.12 100.328,94.12 99.941,94.506 99.941,95.054 100.46,95.573 100.572,95.573 101.092,96.093 101.092,96.38 ; v1(123.19,63.5) 123.676,63.986 123.676,66.708 123.422,66.962 123.422,67.043 123.342,67.123 123.342,75.372 123.19,75.524 v1(123.19,79.921)
D7: R21.2 U1.13 U2.13 X6.7 | length 101.3
  Top Layer w0.203: U1.13@91.305,94.78 v1(100.601,94.78) ; U2.13@91.424,118.642 97.94,118.642 98.119,118.821 v1(100.749,118.821) ; R21.2@102.21,77.791 v1(102.21,78.994) 102.87,79.654 120.799,79.654 121.295,79.159 v1(124.295,79.159) ; v1(124.409,69.596) 125.82,69.596 125.973,69.748 127.274,69.748 127.347,69.675 X6.7@132.024,69.675
  Bottom Layer w0.203: v1(100.601,94.78) 100.639,94.742 101.092,94.742 ; v1(100.749,118.821) 100.804,118.821 101.285,118.341 101.285,118.171 101.752,117.703 101.752,95.402 101.092,94.742 ; v1(102.21,78.994) 102.21,93.624 101.092,94.742 ; v1(124.295,79.159) 124.352,79.102 124.352,69.653 v1(124.409,69.596)
D8: R22.2 U1.42 U2.42 X6.16 | length 112.2
  Top Layer w0.203: U1.42@103.005,94.78 103.043,94.742 v1(104.902,94.742) v1(114.808,94.742) ; U2.42@103.162,118.604 v1(104.869,118.604) ; R22.2@103.276,77.791 v1(103.276,78.994) ; v1(114.994,60.13) 116.482,60.13 116.566,60.046 122.149,60.046 122.453,60.35 128.036,60.35 130.127,58.259 133.308,58.259 X6.16@134.564,59.515
  Bottom Layer w0.203: v1(103.276,78.994) 103.276,93.472 103.873,94.068 104.228,94.068 v1(104.902,94.742) 104.242,95.402 104.242,117.465 104.973,118.197 104.946,118.223 104.946,118.526 v1(104.869,118.604) ; v1(114.808,94.742) 114.808,91.561 114.198,90.952 114.198,82.757 114.452,82.503 114.452,60.594 114.917,60.13 v1(114.994,60.13)
D9: R23.2 U1.44 U2.44 X6.9 | length 104
  Top Layer w0.203: U1.44@103.005,96.38 v1@104.678,96.38 ; U2.44@103.124,120.242 v1@104.797,120.242 ; R23.2@104.343,77.791 v1(104.343,78.994) ; v1(104.902,96.266) v1(115.062,96.266) ; v1(115.57,67.564) 115.621,67.615 121.123,67.615 121.98,68.472 126.682,68.472 126.726,68.428 127.274,68.428 127.324,68.478 130.681,68.478 X6.9@132.024,67.135
  Bottom Layer w0.203: v1(104.343,78.994) 104.343,93.472 104.841,93.97 105.064,93.97 105.562,94.468 105.562,95.606 v1(104.902,96.266) 104.902,96.856 104.75,97.008 104.75,117.399 105.681,118.33 105.681,118.878 105.021,119.538 v1(105.021,120.128) ; v1(115.062,96.266) 115.519,95.809 115.519,89.573 115.468,89.522 115.468,83.396 115.722,83.142 115.722,75.464 115.57,75.311 v1(115.57,67.564)
D10: R24.2 U1.45 U2.45 X6.15 | length 112.1
  Top Layer w0.203: U1.45@103.005,97.18 103.107,97.282 v1(105.41,97.282) v1(116.332,97.282) ; U2.45@103.226,121.144 v1(105.529,121.144) ; R24.2@105.41,77.791 v1(105.41,78.994) ; v1(116.84,60.706) 116.891,60.757 130.782,60.757 X6.15@132.024,59.515
  Bottom Layer w0.203: v1(105.41,78.994) 105.41,93.741 105.969,94.3 105.969,96.723 v1(105.41,97.282) ; 105.529,97.604 105.529,117.603 106.088,118.162 106.088,119.995 105.529,120.554 v1(105.529,121.144) ; v1(116.332,97.282) 116.332,88.646 116.586,88.392 116.586,84.816 116.84,84.562 v1(116.84,60.706)
D11: R25.2 U1.47 U2.47 X6.11 | length 111.2
  Top Layer w0.203: U1.47@103.005,98.78 106.4,98.78 v1(106.426,98.806) v1(117.348,98.806) ; U2.47@103.124,122.642 106.519,122.642 v1(106.545,122.668) ; R25.2@106.477,77.791 v1(106.477,78.994) ; v1(117.856,64.516) 117.895,64.555 131.985,64.555 X6.11@132.024,64.595
  Bottom Layer w0.203: v1(106.477,78.994) v1@106.477,98.806 ; v1@106.545,99.035 v1(106.545,122.668) ; v1(117.348,98.806) 117.399,98.755 117.399,86.091 117.677,85.813 117.677,85.722 117.907,85.492 117.907,64.567 v1(117.856,64.516)
D12: R26.2 U1.48 U2.48 X6.13 | length 116.8
  Top Layer w0.203: U1.48@103.005,99.58 107.43,99.58 v1(107.442,99.568) v1(119.126,99.568) ; U2.48@103.124,123.442 107.549,123.442 v1(107.561,123.43) ; R26.2@107.544,77.791 v1(107.544,78.994) ; v1(119.38,62.23) 119.458,62.152 131.927,62.152 X6.13@132.024,62.055
  Bottom Layer w0.203: v1(107.544,78.994) 107.544,93.472 107.442,93.574 107.442,99.678 107.561,99.797 v1(107.561,123.43) ; v1(119.126,99.568) 119.532,99.162 119.532,87.396 119.786,87.142 119.786,79.229 119.38,78.823 v1(119.38,62.23)
D13: R27.2 U1.50 U2.50 X1.10 | length 85.2
  Top Layer w0.203: U1.50@103.005,101.18 108.624,101.18 v1(108.712,101.092) ; U2.50@103.124,125.042 108.743,125.042 v1(108.831,124.954) ; R27.2@108.61,77.791 v1(108.61,78.994) ; v1(108.785,117.073) 114.344,117.073 114.766,116.65 133.28,116.65 X1.10@134.564,117.935
  Bottom Layer w0.203: v1(108.61,78.994) 108.61,89.953 108.712,90.055 v1(108.712,101.092) 108.785,101.165 v1(108.785,117.073) 108.831,117.119 v1(108.831,124.954)
D14: R28.2 U1.51 U2.51 X7.9 | length 138.8
  Top Layer w0.203: X7.9@71.064,41.76 72.32,40.504 107.352,40.504 110.344,43.496 v1(110.344,43.51) ; U1.51@103.005,101.98 109.602,101.98 v1(109.728,101.854) ; U2.51@103.124,125.842 109.721,125.842 v1(109.847,125.716) ; R28.2@109.677,77.791 v1(109.677,78.994)
  Bottom Layer w0.203: v1(109.847,125.716) 109.787,125.656 109.787,101.913 v1(109.728,101.854) 109.728,90.449 109.677,90.399 v1(109.677,78.994) 109.22,78.537 109.22,75.185 109.271,75.134 109.271,72.71 109.22,72.659 109.22,60.873 109.423,60.67 109.423,53.473 110.378,52.518 110.378,43.545 v1(110.344,43.51)